# EAGLE board nrfled (EAGLE 6.4)
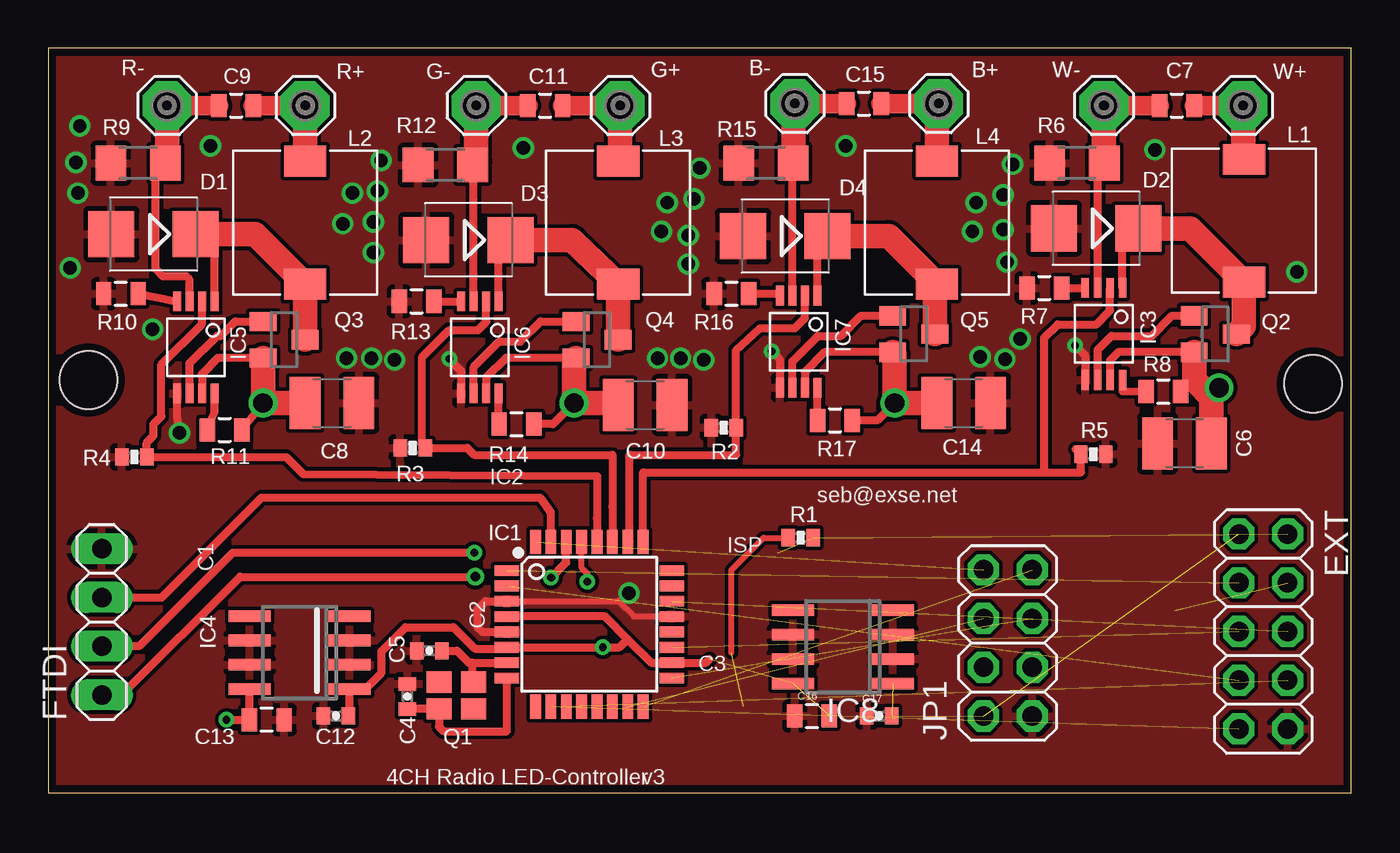
[diagram p0: board, top side]
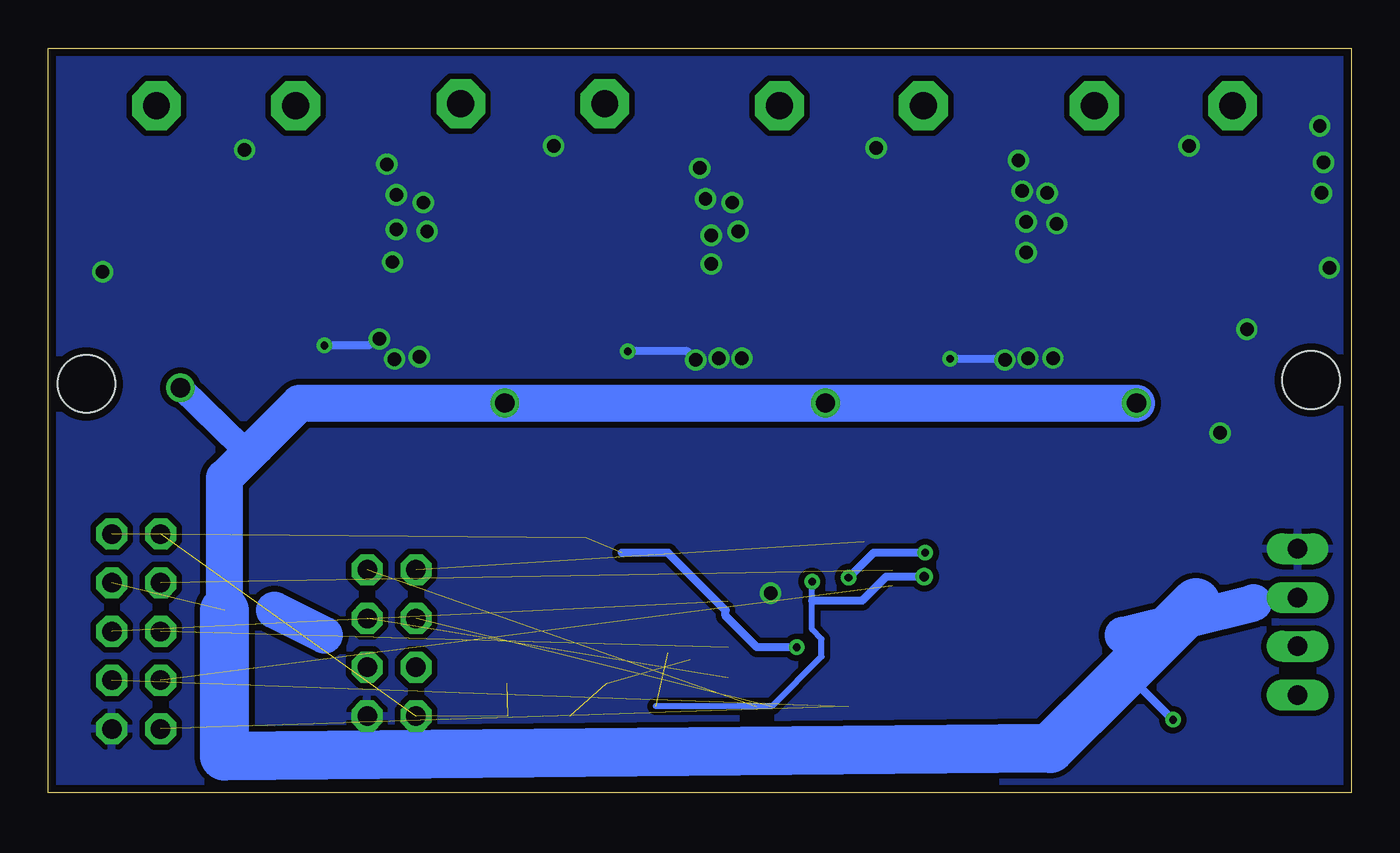
[diagram p1: board, bottom side, seen from below]

Size 67.9 x 38.8 mm. Coordinates in mm from the lower left corner, seen from the top.
Outline: 0,0 67.9,0 67.9,38.8 0,38.8 0,0
Copper layers (1*16): Top 0.035mm / dielectric 1.5mm / Bottom 0.035mm
Design rules "default *": minimum track width 0.2mm, minimum drill 0.5mm, track to track 0.2mm, track to pad 0.2mm, pad to pad 0.2mm, via to via 0.2mm, smd to smd 0mil, copper to edge 0.4mm, drill to drill 8mil, minimum pad ring 0.3mm, minimum via ring 8mil, stop-mask expansion 4mil, vias tented up to drill 40mil, thermal gap 10mil
Net classes: 2 GND/3V3: width 0.2 mm, drill 0.4 mm
Holes 3 mm at 2.1,21.5 65.9,21.3

## Footprints (pad centres in the part's own frame; a part is rotated, then mirrored left to right if it is on the bottom)
SE14 = drill 1.397 pad 2.54 octagon: MP 0,0
0402-CAP = smd 0.7 x 0.9: 1 -0.65,0; 2 0.65,0
C1210 = smd 1.6 x 2.7: 1 -1.4,0; 2 1.4,0
0805 = smd 0.8 x 1.2: 1 -0.9,0; 2 0.9,0
SMB = smd 2.4 x 2.4: A 2.2,0; C -2.2,0
2X05 = drill 1.016 octagon: 1 -5.08,-1.27; 2 -5.08,1.27; 3 -2.54,-1.27; 4 -2.54,1.27; 5 0,-1.27; 6 0,1.27; 7 2.54,-1.27; 8 2.54,1.27; 9 5.08,-1.27; 10 5.08,1.27
1X04 = drill 1.016 long: 1 -3.81,0; 2 -1.27,0; 3 1.27,0; 4 3.81,0
TQFP32-08 = smd 1.27 x 0.559: 1 -4.293,2.8; 2 -4.293,2; 3 -4.293,1.2; 4 -4.293,0.4; 5 -4.293,-0.4; 6 -4.293,-1.2; 7 -4.293,-2; 8 -4.293,-2.8; 17 4.293,-2.8; 18 4.293,-2; 19 4.293,-1.2; 20 4.293,-0.4; 21 4.293,0.4; 22 4.293,1.2; 23 4.293,2; 24 4.293,2.8 | smd 0.559 x 1.27: 9 -2.8,-4.293; 10 -2,-4.293; 11 -1.2,-4.293; 12 -0.4,-4.293; 13 0.4,-4.293; 14 1.2,-4.293; 15 2,-4.293; 16 2.8,-4.293; 25 2.8,4.293; 26 2,4.293; 27 1.2,4.293; 28 0.4,4.293; 29 -0.4,4.293; 30 -1.2,4.293; 31 -2,4.293; 32 -2.8,4.293
MSOP8 = smd 0.41 x 1.02: 1 -0.975,-2.4; 2 -0.325,-2.4; 3 0.325,-2.4; 4 0.975,-2.4; 5 0.975,2.4; 6 0.325,2.4; 7 -0.325,2.4; 8 -0.975,2.4
SO08 = smd 0.6 x 2.2: 1 -1.905,-2.6; 2 -0.635,-2.6; 3 0.635,-2.6; 4 1.905,-2.6; 5 1.905,2.6; 6 0.635,2.6; 7 -0.635,2.6; 8 -1.905,2.6
2X04 = drill 1.016 octagon: 1 -3.81,-1.27; 2 -3.81,1.27; 3 -1.27,-1.27; 4 -1.27,1.27; 5 1.27,-1.27; 6 1.27,1.27; 7 3.81,-1.27; 8 3.81,1.27
PIS2816 = smd 2.2 x 1.6: P$1 0,3.2; P$2 0,-3.2
X22 = smd 1.3 x 1.1: 1 0.9,0.7; 2 -0.9,0.7; 3 -0.9,-0.7; 4 0.9,-0.7
SOT23 = smd 1 x 1.4: 1 -0.95,-1.1; 2 0.95,-1.1; 3 0,1.1
0402-RES = smd 0.7 x 0.9: 1 -0.65,0; 2 0.65,0
R1206 = smd 1.6 x 1.803: 1 -1.422,0; 2 1.422,0

## Placement (x,y rotation side)
B+  SE14  [SE14]  46.4,35.9 0 top
B-  SE14  [SE14]  38.9,35.9 0 top
C4  22pF  [0402-CAP]  18.72,5.01 270 top
C5  22pF  [0402-CAP]  19.86,7.39 0 top
C6  2.2µF / 50V  [C1210]  59.2,18.2 180 top
C7  1µF  [0805]  58.8,35.8 0 top
C8  2.2µF / 50V  [C1210]  14.8,20.3 0 top
C9  1µF  [0805]  9.8,35.8 0 top
C10  2.2µF / 50V  [C1210]  31.1,20.2 0 top
C11  1µF  [0805]  25.9,35.8 0 top
C12  100nF  [0402-CAP]  15,4 0 top
C13  1µF  [0805]  11.4,3.8 180 top
C14  2.2µF / 50V  [C1210]  47.7,20.3 0 top
C15  1µF  [0805]  42.5,35.9 0 top
C16  1µF  [0805]  39.8,4 0 top
C17  100nF  [0402-CAP]  43.3,4 0 top
D1  MBRS140  [SMB]  5.5,29.1 180 top
D2  MBRS140  [SMB]  54.6,29.4 180 top
D3  MBRS140  [SMB]  21.9,28.8 180 top
D4  MBRS140  [SMB]  38.4,29 180 top
EXT  [2X05]  63.3,8.4 270 top
FTDI  [1X04]  2.8,8.9 90 top
G+  SE14  [SE14]  29.8,35.8 0 top
G-  SE14  [SE14]  22.3,35.8 0 top
IC1  MEGA48/88/168-AU  [TQFP32-08]  28.2,8.77 0 top
IC3  LM3401  [MSOP8]  55,23.9 180 top
IC4  78L05SMD  [SO08]  13.1,7.3 90 top
IC5  LM3401  [MSOP8]  7.7,23.2 180 top
IC6  LM3401  [MSOP8]  22.5,23.2 180 top
IC7  LM3401  [MSOP8]  39.1,23.5 180 top
IC8  78L05SMD  [SO08]  41.4,7.6 90 top
JP1  [2X04]  50,7.8 90 top
L1  33µH / 1A  [PIS2816]  62.3,29.8 180 top
L2  33µH / 1A  [PIS2816]  13.4,29.7 180 top
L3  33µH / 1A  [PIS2816]  29.7,29.7 180 top
L4  33µH / 1A  [PIS2816]  46.3,29.7 180 top
Q1  20MHz  [X22]  21.27,5.06 180 top
Q2  MOSFET-PCHANNEL  [SOT23]  60.8,23.9 270 top
Q3  MOSFET-PCHANNEL  [SOT23]  12.3,23.6 270 top
Q4  MOSFET-PCHANNEL  [SOT23]  28.6,23.6 270 top
Q5  MOSFET-PCHANNEL  [SOT23]  45.1,23.9 270 top
R1  10K  [0402-RES]  39.21,13.28 0 top
R2  100K  [0402-RES]  35.2,19.02 180 top
R3  100K  [0402-RES]  19,17.96 180 top
R4  100K  [0402-RES]  4.5,17.49 180 top
R5  100K  [0402-RES]  54.45,17.63 0 top
R6  0R27  [R1206]  53.6,32.8 0 top
R7  5.6k  [0805]  51.9,26.3 0 top
R8  47k  [0805]  58.1,20.9 0 top
R9  0R27  [R1206]  4.7,32.8 0 top
R10  5.6k  [0805]  3.8,26 0 top
R11  47k  [0805]  9.2,18.9 0 top
R12  0R27  [R1206]  20.7,32.7 0 top
R13  5.6k  [0805]  19.2,25.6 0 top
R14  47k  [0805]  24.4,19.2 0 top
R15  0R27  [R1206]  37.4,32.8 0 top
R16  5.6k  [0805]  35.6,26 0 top
R17  47k  [0805]  41,19.4 0 top
R+  SE14  [SE14]  13.4,35.8 0 top
R-  SE14  [SE14]  6.2,35.8 0 top
W+  SE14  [SE14]  62.25,35.8 0 top
W-  SE14  [SE14]  55,35.8 0 top

## Library data of the parts
B+ B- G+ G- R+ R- W+ W- = solpad
C4 C5 C7 C9 C11-C13 C15-C17 Q2-Q5 R1-R5 R7 R8 R10 R11 R13 R14 R16 R17 = SparkFun
C6 C8 C10 C14 R6 R9 R12 R15 = rcl
D1-D4 = diode
EXT FTDI JP1 = pinhead
IC1 = avr-7
IC3 IC5-IC7 L1-L4 Q1 = seb
IC4 IC8 = linear

## Nets
!RE: IC1.9
!RST: FTDI.1 IC1.29 R1.1
+3V3: C17.2 EXT.1 IC8.1 JP1.2
+5V: C12.2 C16.2 EXT.2 IC1.4 IC1.6 IC1.18 IC4.1 IC8.8 R1.2
+12V: C6.1 C8.1 C10.1 C13.2 C14.1 EXT.4 IC3.7 IC4.8 IC5.7 IC6.7 IC7.7 Q2.2 Q3.2 Q4.2 Q5.2 R8.2 R11.2 R14.2 R17.2
AIN0: EXT.5 IC1.19
AIN1: EXT.6 IC1.22
CE: JP1.3
CSN: JP1.4
GND: C4.1 C5.1 C6.2 C8.2 C10.2 C12.1 C13.1 C14.2 C16.1 C17.1 D1.A D2.A D3.A D4.A EXT.10 FTDI.4 IC1.3 IC1.5 IC1.21 IC3.5 IC4.2 IC4.3 IC4.6 IC4.7 IC5.5 IC6.5 IC7.5 IC8.2 IC8.3 IC8.6 IC8.7 JP1.1 R2.2 R3.2 R4.2 R5.2 R6.1 R7.1 R9.1 R10.1 R12.1 R13.1 R15.1 R16.1
INT: EXT.3 IC1.1
IO0: EXT.7 IC1.2
IO1: EXT.8 IC1.10
IO2: EXT.9 IC1.11
IRQ: IC1.32 JP1.8
MISO: IC1.16 JP1.7
MOSI: IC1.15 JP1.6
N$1: C7.1 IC3.3 R6.2 W-.MP
N$2: C7.2 L1.P$2 W+.MP
N$3: D2.C IC3.1 L1.P$1 Q2.3
N$4: C9.1 IC5.3 R9.2 R-.MP
N$5: IC3.4 R7.2
N$6: C9.2 L2.P$2 R+.MP
N$7: IC3.8 R8.1
N$8: D1.C IC5.1 L2.P$1 Q3.3
N$9: IC5.4 R10.2
N$10: IC3.6 Q2.1
N$11: IC5.8 R11.1
N$12: IC5.6 Q3.1
N$13: C11.1 G-.MP IC6.3 R12.2
N$14: C11.2 G+.MP L3.P$2
N$15: D3.C IC6.1 L3.P$1 Q4.3
N$16: IC6.4 R13.2
N$17: IC6.8 R14.1
N$20: IC6.6 Q4.1
N$21: B-.MP C15.1 IC7.3 R15.2
N$22: B+.MP C15.2 L4.P$2
N$23: D4.C IC7.1 L4.P$1 Q5.3
N$24: IC7.4 R16.2
N$25: IC7.8 R17.1
N$26: IC7.6 Q5.1
PB: IC1.26 IC7.2 R2.1
PG: IC1.27 IC6.2 R3.1
PR: IC1.28 IC5.2 R4.1
PW: IC1.25 IC3.2 R5.1
RXD: FTDI.2 IC1.30
SCK: IC1.17 JP1.5
TXD: FTDI.3 IC1.31
XTAL1: C5.2 IC1.7 Q1.3
XTAL2: C4.2 IC1.8 Q1.1

## Tracks (layer width: path | path; a pad name or v marks a point on that pad's centre or on a via)
!RE
  Top 0.406: IC1.9 25.39,4.39
!RST  (via drill 0.4, 0.5)  (1 unrouted)
  Top 0.305: IC1.29 27.8,11.71 28.1,11.4 v28.1,11 | 35.6,7.29 35.6,11.6 37.28,13.28 R1.1
  Top 0.406: FTDI.1 3.84,5.09 10,11.25 v22.25,11.25
  Bottom 0.305: v28.1,11 28.1,10 28.1,8.5 27.6,8 27.6,7.1 30.2,4.5 36.23,4.5
  Bottom 0.406: v22.25,11.25 24.25,11.25 25.5,10 28.1,10
+3V3  (3 unrouted)
+5V  (via drill 0.4)  (4 unrouted)
  Top 0.305: 39.85,13.27 R1.2
  Top 0.406: 30.2,8 29.03,9.17 IC1.4 | 30.2,8 31.43,6.77 IC1.18 34.27,6.77 34.45,6.95 | 30.2,8 29.77,7.57 v28.9,7.57 IC1.6 23.83,7.5 22.25,7.5 21.12,8.62 18.62,8.62 17.38,7.38 17.38,6.25 16.52,5.39 IC4.1 15.7,3.95 C12.2
  Bottom 0.406: v28.9,7.57 30.97,7.57 32.6,9.2 32.6,9.5 35.6,12.5 38.01,12.5
+12V  (via drill 0.4, 1)  (1 unrouted)
  Top 0.406: IC5.7 8.03,21.82 8.85,22.65 Q3.2 | IC6.7 22.82,21.62 23.85,22.65 Q4.2 | IC7.7 39.42,21.93 40.45,22.95 Q5.2 | IC3.7 55.33,22.52 55.75,22.95 Q2.2 | R17.2 43.2,19.4 v44.1,20.3 | R14.2 26.3,19.2 v27.4,20.3 | v11.2,20.3 R11.2 | IC4.8 C13.2 v9.3,3.8
  Top 0.61: R8.2 59.7,21.6 59.7,21.8
  Top 1.27: C8.1 v11.2,20.3 Q3.2 | C10.1 29.6,20.3 v27.4,20.3 27.4,22.55 Q4.2 | C14.1 v44.1,20.3 44.1,22.85 Q5.2 | 60.6,20.6 C6.1 | 60.6,20.6 59.7,21.5 59.7,21.8 Q2.2 | 60.6,20.6 61,21 v61,21.1
  Bottom 0.406: v9.3,3.8 11.15,5.65 12.35,5.65
  Bottom 1.27: v61,21.1 57.85,18.05 57.05,18.05
  Bottom 1.93: v11.2,20.3 v27.4,20.3 v44.1,20.3 54.8,20.3 57.05,18.05 58.7,16.4 58.7,9.49
  Bottom 2.54: 8.1,9.9 12.35,5.65 15.7,2.3 58.7,1.9 58.7,9.49
AIN0  (1 unrouted)
AIN1  (1 unrouted)
GND  (via drill 0.4, 0.7)
  Top 0.305: IC1.21 30.53,9.17 29.7,10 29.67,9.97 IC1.3
  Top 0.406: IC1.5 22.63,8.37 22.35,8.65 22.35,9.54 22.79,9.97 IC1.3 | IC5.5 6.72,19.57 v6.85,18.74 | IC3.5 54.02,22.77 v53.5,23.3 | IC7.5 38.12,22.57 v37.7,23 | IC6.5 21.52,21.98 v20.9,22.6
  Bottom 0.406: v53.5,23.3 51.2,23.3 v50.64,23.64 | v37.7,23 34.61,23 v34.15,22.54 | v20.9,22.6 18.11,22.6 v18.05,22.54
  other vias: 57.66,33.5 30.26,10.4 49.85,22.59 48.56,22.71 32.95,22.64 31.75,22.64 15.55,22.64 16.85,22.64 16.95,28.14 16.95,29.74 17.15,31.34 17.35,32.94 1.15,27.34 1.55,31.24 1.45,32.84 1.65,34.74 49.95,27.64 49.75,29.34 49.75,31.14 50.25,32.74 33.35,27.54 33.35,29.04 33.65,30.94 33.95,32.54 15.35,29.64 15.85,31.24 31.95,29.24 32.25,30.74 48.15,29.24 48.35,30.74 65.05,27.14 41.56,33.7 24.76,33.6 8.46,33.7 5.45,24.14
  pour Bottom (isolate 0.305, rank 2): 0.04,38.78 0.1,0 67.89,0 67.88,38.78
  pour Top: 67.9,0 67.8,38.7 0.1,38.7 0,38.7 0,0
INT  (1 unrouted)
IO0  (1 unrouted)
IO1  (1 unrouted)
IO2  (1 unrouted)
IRQ  (1 unrouted)
MISO  (1 unrouted)
MOSI  (1 unrouted)
N$1
  Top 0.406: IC3.3 54.67,32.35 R6.2
  Top 1.016: W-.MP C7.1
  Top 1.27: W-.MP 55,32.82 R6.2
N$2
  Top 1.016: W+.MP C7.2
  Top 1.27: W+.MP 62.25,33.05 L1.P$2
N$3
  Top 0.406: IC3.1 55.98,28.68 D2.C
  Top 1.27: D2.C 59.5,29.4 L1.P$1 62.3,24.3 Q2.3
N$4
  Top 0.406: 5.88,32.55 R9.2 5.6,32.28 5.6,27.3 6,26.9 7.2,26.9 7.38,26.73 IC5.3
  Top 1.016: R-.MP C9.1
  Top 1.27: R9.2 6.2,32.88 R-.MP
N$5
  Top 0.406: R7.2 IC3.4
N$6
  Top 1.016: R+.MP C9.2
  Top 1.27: L2.P$2 R+.MP
N$7
  Top 0.406: IC3.8 55.98,20.93 R8.1
N$8
  Top 0.406: IC5.1 8.68,28.68 D1.C
  Top 1.27: D1.C 10.8,29.1 L2.P$1 Q3.3
N$9
  Top 0.406: R10.2 IC5.4
N$10
  Top 0.406: IC3.6 54.67,23.07 55.4,23.8 57.5,23.8 58.55,24.85 Q2.1
N$11
  Top 0.406: IC5.8 8.68,19.82 R11.1
N$12
  Top 0.406: IC5.6 7.38,22.38 8.8,23.8 9,23.8 9.75,24.55 Q3.1
N$13
  Top 0.406: IC6.3 22.18,32.25 R12.2
  Top 1.016: G-.MP C11.1
  Top 1.27: R12.2 22.3,32.88 G-.MP
N$14
  Top 1.016: G+.MP C11.2
  Top 1.27: L3.P$2 29.8,32.9 G+.MP
N$15
  Top 0.406: IC6.1 23.48,28.27 D3.C
  Top 1.27: D3.C 27.3,28.8 L3.P$1 Q4.3
N$16
  Top 0.406: R13.2 IC6.4
N$17
  Top 0.406: IC6.8 23.48,19.23 R14.1
N$20
  Top 0.406: IC6.6 22.18,22.18 23.5,23.5 24.6,23.5 25.65,24.55 Q4.1
N$21
  Top 0.406: IC7.3 38.77,32.05 R15.2
  Top 1.016: B-.MP C15.1
  Top 1.27: B-.MP 38.82,35.82 R15.2
N$22
  Top 1.016: B+.MP C15.2
  Top 1.27: B+.MP 46.3,35.8 L4.P$2
N$23
  Top 0.406: IC7.1 40.08,28.38 D4.C
  Top 1.27: D4.C 43.8,29 L4.P$1 46.2,26.4 Q5.3
N$24
  Top 0.406: R16.2 37.92,26 IC7.4
N$25
  Top 0.406: IC7.8 40.08,19.43 R17.1
N$26
  Top 0.406: IC7.6 38.77,22.48 40.1,23.8 41.3,23.8 42.35,24.85 Q5.1
N$27
  Bottom 1.93: 11.9,8.2 5.1,9.9
N$28
  Bottom 1.93: 53.5,8.2 56.1,9.5
PB
  Top 0.406: IC7.2 39.42,24.73 38.9,24.2 37.1,24.2 35.85,23.05 R2.1 35.85,17.6 30.3,17.6 30.3,13.07 IC1.26
PG
  Top 0.406: IC1.27 29.39,14.9 29.4,17.6 22.2,17.6 21.84,17.96 R3.1 19.5,18.11 19.5,22.7 20.9,24.1 22.4,24.1 22.82,24.52 IC6.2
PR
  Top 0.406: IC5.2 8.03,24.43 5.9,22.3 5.9,19.6 5.5,19.2 5.5,18.6 5.15,18.25 R4.1 12.41,17.49 13.3,16.6 28.6,16.5 28.59,14.3 IC1.28
PW
  Top 0.406: IC3.2 55.33,25.12 54.6,24.4 52.6,24.4 51.9,23.7 51.9,16.7 | IC1.25 31,16.7 51.9,16.7 | 53.54,17.9 R5.1 53.8,16.7 51.9,16.7
RXD  (via drill 0.4)
  Top 0.406: v26.2,11.2 27,11.99 IC1.30 | v22.2,12.5 9.62,12.5 4.75,7.62 FTDI.2
  Bottom 0.406: v22.2,12.5 24.9,12.5 v26.2,11.2
SCK  (1 unrouted)
TXD
  Top 0.406: IC1.31 26.2,14.57 25.62,15.38 11.12,15.38 5.92,10.17 FTDI.3
XTAL1
  Top 0.406: 22.1,6.77 21.93,6.77 21.31,7.39 C5.2 | 22.1,6.77 IC1.7 | Q1.3 22.1,5.63 22.1,6.77
XTAL2
  Top 0.406: Q1.1 20.44,4.09 | IC1.8 23.9,3.2 20.6,3.2 20.37,3.43 Q1.1 | Q1.1 C4.2

## Text on the board
tPlace: seb@exse.net | 4CH Radio LED-Controller | v3
_tNames: R- | C9 | R+ | G- | C11 | G+ | B- | C15 | B+ | W- | C7 | W+ | L1 | R9 | L2 | R12 | L3 | R15 | L4 | R6 | D1 | D3 | D4 | D2 | IC7 | IC3 | R10 | IC5 | Q3 | R13 | IC6 | Q4 | R16 | Q5 | R7 | Q2 | R8 | R5 | R17 | C14 | R4 | R11 | C8 | R14 | C10 | R2 | C6 | R3 | IC2 | R1 | IC1 | ISP | C1 | C2 | IC4 | C5 | C3 | C13 | C12 | C4 | Q1
_tValues: SE14 | SE14 | SE14 | SE14 | SE14 | SE14 | SE14 | SE14 | 33µH / 1A | 33µH / 1A | 1µF | 33µH / 1A | 33µH / 1A | 1µF | 1µF | 1µF | MBRS140 | MBRS140 | MBRS140 | MBRS140 | 0R27 | 0R27 | 0R27 | 0R27 | LM3401 | LM3401 | 5.6k | LM3401 | MOSFET-PCHANNEL | LM3401 | MOSFET-PCHANNEL | 5.6k | MOSFET-PCHANNEL | 5.6k | MOSFET-PCHANNEL | 5.6k | 2.2µF / 50V | 47k | 47k | 47k | 47k | 2.2µF / 50V | 2.2µF / 50V | 2.2µF / 50V | RJ45-8L-B | 100K | 78L05SMD | MEGA48/88/168-AU | 1µF | RJ45-8L-B | 100nF